# Altium PCB bdcmc25.PcbDoc (part 3 of 4)
Units mil, origin at the board's own origin, x right, y up, seen from the top; angles counter-clockwise.
Board outline 7750 x 2750 mil, 4 copper layers (Layer 1, Layer 2 (GND), Layer 3 (GND), Layer 4), stack 23.756 mil thick; 330 components, 156 nets, 997 pads, 1122 vias.
Unrouted connection lines stored in the file: 39.
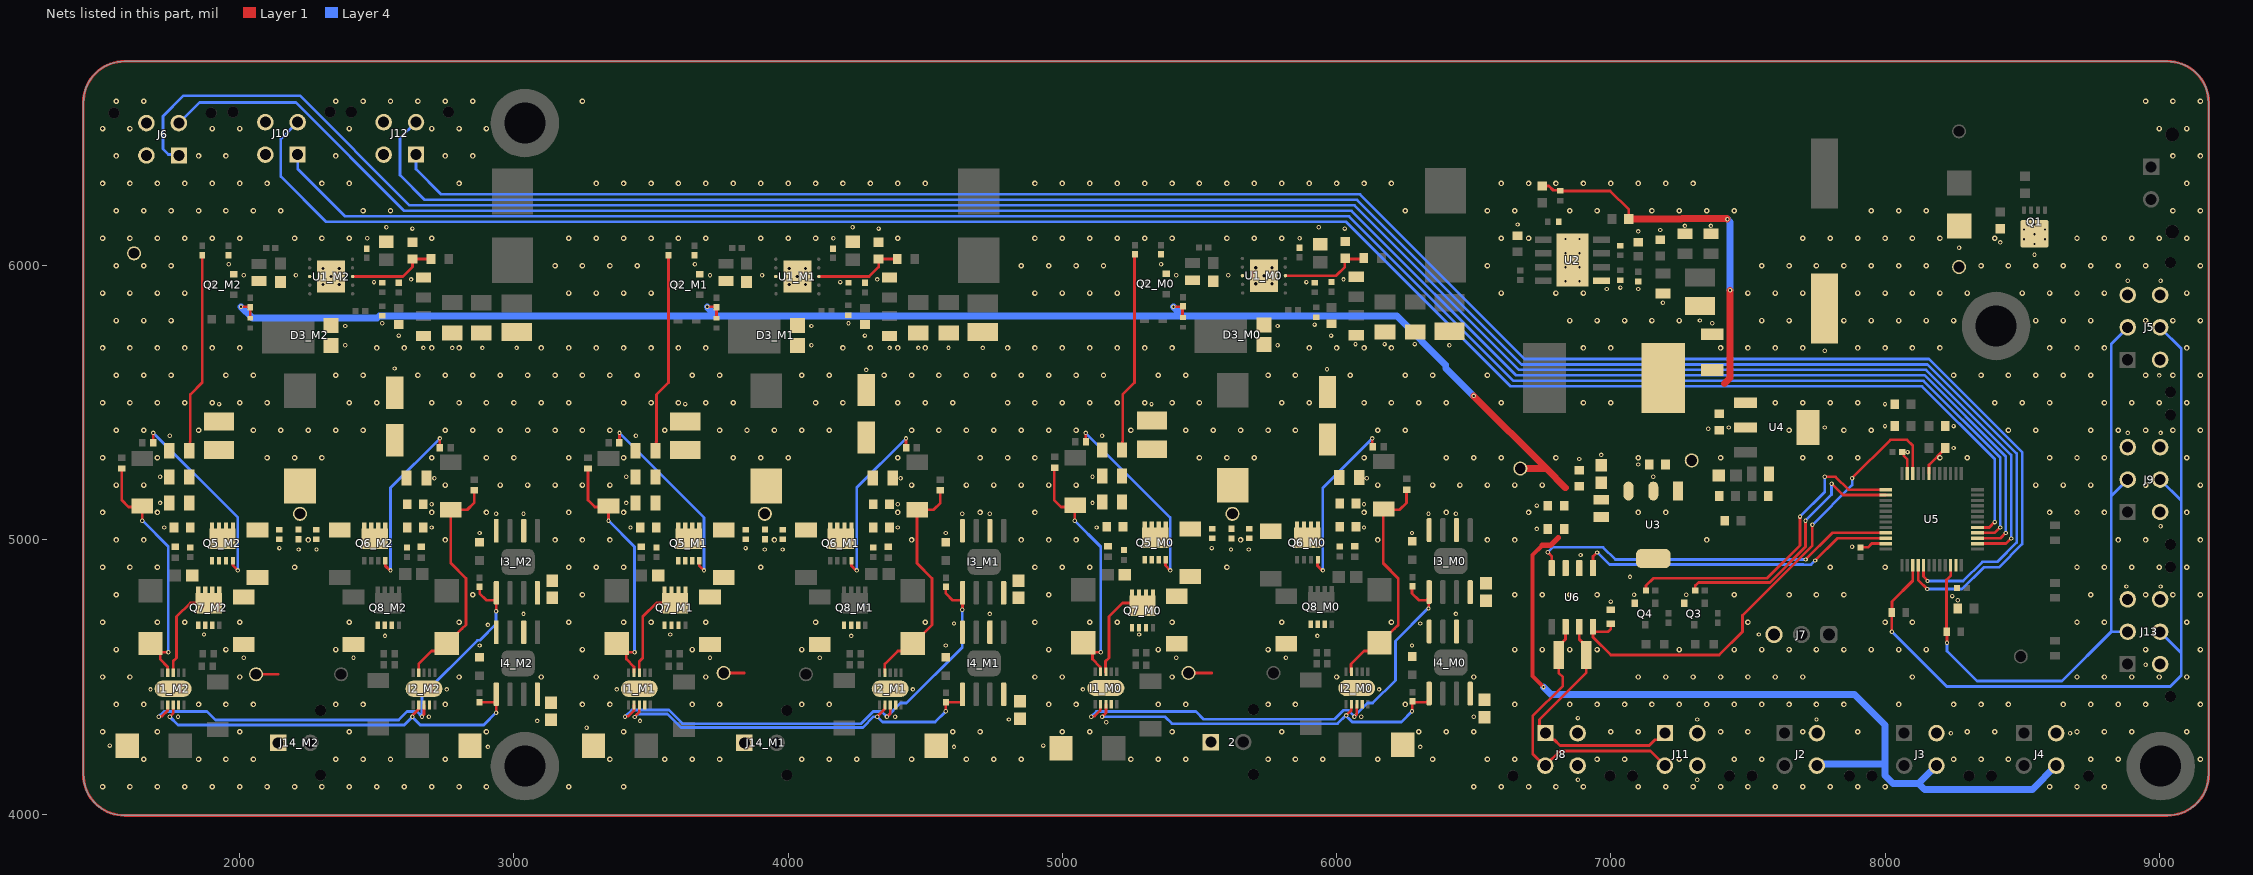
[diagram p4: the nets of this part, all layers, seen from the top]

## Via types
v1: diameter 20, hole 10, Layer 1 to Layer 4, 760 vias
v2: diameter 16, hole 8, Layer 1 to Layer 4, 340 vias
v3: diameter 23.62, hole 11.81, Layer 1 to Layer 4, 15 vias
v4: diameter 19.68, hole 7.87, Layer 1 to Layer 4, 7 vias

## Nets (pads, with @x,y where several pads share a name; then routed paths per layer and width w, separated by ;. In a path a pad name is that pad's centre, name@x,y a point inside that pad or via, vN(x,y) a via of type N, cw(c..) or ccw(c..) an arc to the next point about the centre after c; other vN are vias at no path point) (continued)
GND: (continued)
  other v1: 1500,4100 1600,4100 1700,4100 1800,4100 1900,4100 2000,4100 2100,4100 2200,4100 2300,4100 2400,4100 2500,4100 2600,4100 2700,4100 2800,4100 2900,4100 3200,4100 3400,4100 6500,4100 6600,4100 6700,4100 6800,4100 6900,4100 7100,4100 7200,4100 7300,4100 7400,4100 7500,4100 7600,4100 7700,4100 7800,4100 7900,4100 8000,4100 8600,4100 8700,4100 8800,4100 1650,4200 1850,4200 1950,4200 2050,4200 2350,4200 2450,4200 2550,4200 2750,4200 3350,4200 3550,4200 3650,4200 3750,4200 4050,4200 4150,4200 4250,4200 4450,4200 4650,4200 4750,4200 4850,4200 5250,4200 5350,4200 5450,4200 5750,4200 5850,4200 5950,4200 6150,4200 6350,4200 6550,4200 6650,4200 6950,4200 7050,4200 7250,4200 7450,4200 7550,4200 8250,4200 8350,4200 8450,4200 8750,4200 8850,4200 9150,4200 1500,4300 1700,4300 2000,4300 2400,4300 2900,4300 3400,4300 4600,4300 4700,4300 5000,4300 5100,4300 5400,4300 5800,4300 6300,4300 6400,4300 6500,4300 7000,4300 7100,4300 7400,4300 7500,4300 7700,4300 7900,4300 8300,4300 8400,4300 8700,4300 8800,4300 8900,4300 9100,4300 1550,4400 1650,4400 1850,4400 1950,4400 2050,4400 2350,4400 2450,4400 2750,4400 3250,4400 3350,4400 3650,4400 3750,4400 4050,4400 4150,4400 4950,4400 5050,4400 5350,4400 5450,4400 5750,4400 5850,4400 6250,4400 6650,4400 6850,4400 6950,4400 7050,4400 7150,4400 7250,4400 7350,4400 7450,4400 7550,4400 7650,4400 7750,4400 7850,4400 8050,4400 8250,4400 8350,4400 8450,4400 8650,4400 8750,4400 8850,4400 8950,4400 9150,4400 1500,4500 1600,4500 2000,4500 2800,4500 3100,4500 3300,4500 3700,4500 4900,4500 5000,4500 5400,4500 6000,4500 6500,4500 7100,4500 7200,4500 7300,4500 7400,4500 7500,4500 7600,4500 7700,4500 8100,4500 8700,4500 8800,4500 8900,4500 9000,4500 9100,4500 1550,4600 1950,4600 2350,4600 3250,4600 3650,4600 4050,4600 4950,4600 5350,4600 5750,4600 6650,4600 6750,4600 6850,4600 6950,4600 7250,4600 7450,4600 7550,4600 7650,4600 7750,4600 7850,4600 7950,4600 8050,4600 8150,4600 8950,4600 9150,4600 1500,4700 1700,4700 1800,4700 2000,4700 2400,4700 2800,4700 3200,4700 3400,4700 3500,4700 3700,4700 4100,4700 4500,4700 4900,4700 5100,4700 5200,4700 5400,4700 5800,4700 6200,4700 7500,4700 8000,4700 8100,4700 8700,4700 8800,4700 9100,4700 1550,4800 2850,4800 3250,4800 4950,4800 6650,4800 6750,4800 6850,4800 6950,4800 7450,4800 7650,4800 7750,4800 7850,4800 8750,4800 8950,4800 9050,4800 9150,4800 1500,4900 1600,4900 1700,4900 2200,4900 3200,4900 3300,4900 3400,4900 3900,4900 4900,4900 5000,4900 5100,4900 5600,4900 7800,4900 8000,4900 8700,4900 8800,4900 8900,4900 9000,4900 9100,4900 1550,5000 1650,5000 2250,5000 2750,5000 3150,5000 3250,5000 3350,5000 3950,5000 4450,5000 4850,5000 4950,5000 5050,5000 5650,5000 6150,5000 6550,5000 6650,5000 7350,5000 8850,5000 8950,5000 9150,5000 1500,5100 1700,5100 2700,5100 2900,5100 3200,5100 3400,5100 4400,5100 4700,5100 4900,5100 6100,5100 6400,5100 6700,5100 7100,5100 7200,5100 8600,5100 8700,5100 8800,5100 9100,5100 1550,5200 1650,5200 2750,5200 2950,5200 3050,5200 3150,5200 3250,5200 3350,5200 4450,5200 4650,5200 4750,5200 4850,5200 4950,5200 5050,5200 6150,5200 6350,5200 6450,5200 6550,5200 6650,5200 6750,5200 8550,5200 8650,5200 8750,5200 8950,5200 9150,5200 1500,5300 1700,5300 2100,5300 2200,5300 2300,5300 2700,5300 2900,5300 3000,5300 3200,5300 3400,5300 3800,5300 3900,5300 4000,5300 4400,5300 4700,5300 4800,5300 4900,5300 5500,5300 5600,5300 5700,5300 6100,5300 6400,5300 6500,5300 6600,5300 6800,5300 7100,5300 7400,5300 7700,5300 7800,5300 7900,5300 8200,5300 8300,5300 8600,5300 8700,5300 8800,5300 9100,5300 1550,5400 1650,5400 1850,5400 2050,5400 2150,5400 2250,5400 2350,5400 2450,5400 2750,5400 2850,5400 2950,5400 3050,5400 3150,5400 3250,5400 3350,5400 3550,5400 3750,5400 3850,5400 3950,5400 4050,5400 4150,5400 4450,5400 4550,5400 4650,5400 4750,5400 4850,5400 4950,5400 5050,5400 5250,5400 5450,5400 5550,5400 5650,5400 5750,5400 5850,5400 6150,5400 6250,5400 7650,5400 7850,5400 7950,5400 8450,5400 8550,5400 8750,5400 8850,5400 8950,5400 9050,5400 9150,5400 1500,5500 1600,5500 1700,5500 1800,5500 1900,5500 2000,5500 2100,5500 2400,5500 2500,5500 2700,5500 2800,5500 2900,5500 3000,5500 3100,5500 3200,5500 3400,5500 3500,5500 3600,5500 3700,5500 3800,5500 4100,5500 4200,5500 4400,5500 4500,5500 4600,5500 4800,5500 4900,5500 5000,5500 5100,5500 5200,5500 5300,5500 5400,5500 5500,5500 5800,5500 5900,5500 6100,5500 6200,5500 6300,5500 6400,5500 6600,5500 6900,5500 7000,5500 7600,5500 7700,5500 7800,5500 7900,5500 8400,5500 8500,5500 8600,5500 8800,5500 8900,5500 9000,5500 9100,5500 1550,5600 1650,5600 1750,5600 1950,5600 2050,5600 2350,5600 2450,5600 2650,5600 2750,5600 2850,5600 2950,5600 3050,5600 3150,5600 3250,5600 3350,5600 3450,5600 3650,5600 3750,5600 4050,5600 4150,5600 4350,5600 4450,5600 4550,5600 4650,5600 4750,5600 4850,5600 4950,5600 5050,5600 5150,5600 5350,5600 5450,5600 5750,5600 5850,5600 6050,5600 6250,5600 6350,5600 6550,5600 8250,5600 8350,5600 8450,5600 8550,5600 8650,5600 8750,5600 8950,5600 9050,5600 9150,5600 1500,5700 1600,5700 1700,5700 1800,5700 1900,5700 2000,5700 2500,5700 2600,5700 2700,5700 2800,5700 3100,5700 3200,5700 3300,5700 3400,5700 3500,5700 3600,5700 3700,5700 4200,5700 4300,5700 4400,5700 4500,5700 4800,5700 4900,5700 5000,5700 5100,5700 5200,5700 5300,5700 5400,5700 5900,5700 6000,5700 6100,5700 6200,5700 6900,5700 7000,5700 7400,5700 7500,5700 7600,5700 7700,5700 7900,5700 8000,5700 8100,5700 8200,5700 8600,5700 8700,5700 8800,5700 9100,5700 1550,5800 1650,5800 1750,5800 6850,5800 6950,5800 7050,5800 7150,5800 7250,5800 7550,5800 7650,5800 7850,5800 7950,5800 8050,5800 8150,5800 8250,5800 8550,5800 8650,5800 8750,5800 8950,5800 9050,5800 9150,5800 1500,5900 1600,5900 1700,5900 1800,5900 3200,5900 3300,5900 3400,5900 3500,5900 4900,5900 5000,5900 5100,5900 5200,5900 6600,5900 6800,5900 6900,5900 7500,5900 7600,5900 7700,5900 7900,5900 8000,5900 8100,5900 8200,5900 8300,5900 8500,5900 8600,5900 8700,5900 8800,5900 9100,5900 1550,6000 1650,6000 1750,6000 3150,6000 3250,6000 3350,6000 3450,6000 4850,6000 4950,6000 5050,6000 5150,6000 6550,6000 7550,6000 7650,6000 7750,6000 7850,6000 7950,6000 8050,6000 8150,6000 8350,6000 8450,6000 8550,6000 8650,6000 8750,6000 8850,6000 8950,6000 9150,6000 1500,6100 1600,6100 1700,6100 1800,6100 1900,6100 2000,6100 2200,6100 2300,6100 2400,6100 2700,6100 3200,6100 3300,6100 3400,6100 3500,6100 3600,6100 3700,6100 3900,6100 4000,6100 4100,6100 4400,6100 4900,6100 5000,6100 5100,6100 5200,6100 5300,6100 5400,6100 5600,6100 5700,6100 5800,6100 6600,6100 6700,6100 7700,6100 7800,6100 7900,6100 8000,6100 8100,6100 8200,6100 8400,6100 8700,6100 8800,6100 8900,6100 9000,6100 9100,6100 1550,6200 1650,6200 1750,6200 1850,6200 1950,6200 2050,6200 2150,6200 2450,6200 2550,6200 6250,6200 6550,6200 6650,6200 6850,6200 6950,6200 7150,6200 7250,6200 7350,6200 7450,6200 7950,6200 8050,6200 8150,6200 9050,6200 9150,6200 1500,6300 1600,6300 1700,6300 1800,6300 1900,6300 2000,6300 2100,6300 2300,6300 2400,6300 2800,6300 3300,6300 3400,6300 3500,6300 3600,6300 3700,6300 3800,6300 3900,6300 4000,6300 4100,6300 4200,6300 4300,6300 4400,6300 4500,6300 4900,6300 5000,6300 5100,6300 5200,6300 5300,6300 5400,6300 5500,6300 5600,6300 5700,6300 5800,6300 5900,6300 6000,6300 6100,6300 6200,6300 6600,6300 6700,6300 6800,6300 6900,6300 7000,6300 7100,6300 7200,6300 7300,6300 9100,6300 1550,6400 1850,6400 1950,6400 2350,6400 2750,6400 2850,6400 9050,6400 9150,6400 1500,6500 1600,6500 1900,6500 2000,6500 2400,6500 2700,6500 2800,6500 2900,6500 9000,6500 9100,6500 1550,6600 1650,6600 2350,6600 2450,6600 2550,6600 2650,6600 2750,6600 2850,6600 3250,6600 8950,6600 9050,6600 9150,6600
  other v2: 6880,4125 7315,4125 2905,4245 4605,4245 6305,4245 1526.16,4250 4930,4250 8240,4295 8675,4295 3265,4315 5160,4335 3085,4340 3460,4340 4805,4345 7315,4345 7750,4345 6880,4350 1775,4355 2690,4355 4390,4355 6090,4355 6500,4355 1675,4455 2755,4455 3375,4455 4455,4455 5075,4455 6155,4455 8950,4545 2015,4570 2415,4570 3715,4570 4115,4570 5415,4570 5815,4570 2875,4615 4575,4615 6275,4615 2530,4650 4230,4650 5930,4650 1870,4655 3570,4655 5280,4655 7540,4655 2905,4690 4605,4695 6305,4695 3035,4730 4735,4730 6435,4730 7000,4775 8265,4780 8245,4795 7085,4800 7275,4800 8880,4830 9005,4830 7070,4865 6890,4945 2215,4965 2280,4965 3915,4965 3980,4965 5615,4965 5680,4965 2145,4970 3845,4970 5545,4970 7880,4975 2875,5025 4575,5025 6275,5025 6730,5040 1725,5045 2700,5045 3425,5045 4400,5045 5125,5045 6100,5045 9005,5050 2935,5095 3035,5095 4635,5095 4735,5095 6335,5095 6435,5095 6730,5125 2700,5130 4400,5130 6100,5130 1710,5135 3410,5135 5110,5135 2710,5225 4410,5225 6110,5225 1710,5230 3410,5230 5110,5230 7155,5230 7100,5275 6885,5295 6965,5310 8082.26,5320 8250,5335 1745,5380 3445,5380 5145,5380 8885,5390 9005,5390 7355,5405 7430,5410 7780,5410 8000,5415 8250,5415 1925,5495 3625,5495 5325,5495 8000,5495 9000,5600 4285,5620 5965,5622.16 2565,5625 7780,5690 2670,5700 2775,5700 2885,5700 3010,5700 4370,5700 4475,5700 4585,5700 4710,5700 2385,5710 4085,5710 5785,5710 6411.51,5710 6068.94,5713.91 6175,5713.91 6285,5713.91 2580,5745 4280,5745 5980,5745 2385,5780 4085,5780 5785,5780 5920,5785 2520,5790 4220,5790 7370,5790 7325,5800 7190,5865 6985,5915 7100,5915 7035,5920 2490,5940 4190,5940 5890,5940 8885,5945 9005,5945 2625,5950 4325,5950 6025,5950 2015,5965 2205,5965 3715,5965 3905,5965 5415,5965 5605,5965 1960,6005 3660,6005 5360,6005 8545,6040 8270,6065 8420,6085 2465,6100 4165,6100 5865,6100 7100,6125 7180,6130 2630,6135 4330,6135 6030,6135 2535,6140 4235,6140 5935,6140 7270,6145 7365,6145 6660,6150
  other v3: 2303.97,5930.94 2363.02,5930.94 4004.08,5930.94 4063.14,5930.94 5705.47,5933.74 5764.53,5933.74 2333.49,5960.47 4033.61,5960.47 5735,5963.27 2303.97,5990 2363.02,5990 4004.08,5990 4063.14,5990 5705.47,5992.8 5764.53,5992.8
  other v4: 8545,6078.74 8506.61,6096.57 8583.39,6096.57 8545,6114.37 8506.61,6132.2 8583.39,6132.2 8545,6150
HO_1G_M0: D6_M0.2 D14_M0.2 I1_M0.4 R22_M0.2 | length 888.6
  Layer 1 w10: R22_M0.2@4970,5260.32 4970,5145 4995,5120 5041.61,5120 5045,5123.39 v2(5045,5070) ; I1_M0.4@5137.79,4516.1 5137.79,4537.21 5110,4565 5110,4587.2 5112.8,4590 v2(5140,4590)
  Layer 4 w10: v2(5045,5070) 5140,4975 v2(5140,4590)
HO_1G_M1: D6_M1.2 D14_M1.2 I1_M1.4 R22_M1.2 | length 888.6
  Layer 1 w10: R22_M1.2@3270,5260.32 3270,5145 3295,5120 3341.61,5120 3345,5123.39 v2(3345,5070) ; I1_M1.4@3437.79,4516.1 3437.79,4537.21 3410,4565 3410,4587.2 3412.8,4590 v2(3440,4590)
  Layer 4 w10: v2(3345,5070) 3440,4975 v2(3440,4590)
HO_1G_M2: D6_M2.2 D14_M2.2 I1_M2.4 R22_M2.2 | length 888.6
  Layer 1 w10: R22_M2.2@1570,5260.32 1570,5145 1595,5120 1641.61,5120 D6_M2.2@1645,5123.39 v2(1645,5070) ; I1_M2.4@1737.79,4516.1 1737.79,4537.21 1710,4565 1710,4587.2 1712.8,4590 v2(1740,4590)
  Layer 4 w10: v2(1645,5070) 1740,4975 v2(1740,4590)
HO_1M_M0: Q5_M0.1 R23_M0.2 | length 706.7
  Layer 1 w10: R23_M0.2@5084.69,5355 5085,5355.31 v2(5085,5390) ; Q5_M0.1@5375.71,4924.53 5375.71,4906.49 v2(5393.26,4888.95)
  Layer 4 w10: v2(5085,5390) 5393.26,5081.74 v2(5393.26,4888.95)
HO_1M_M1: Q5_M1.1 R23_M1.2 | length 706.7
  Layer 1 w10: R23_M1.2@3384.69,5355 3385,5355.31 v2(3385,5390) ; Q5_M1.1@3675.71,4924.53 3675.71,4906.49 v2(3693.26,4888.95)
  Layer 4 w10: v2(3385,5390) 3693.26,5081.74 v2(3693.26,4888.95)
HO_1M_M2: Q5_M2.1 R23_M2.2 | length 706.7
  Layer 1 w10: R23_M2.2@1684.69,5355 1685,5355.31 v2(1685,5390) ; Q5_M2.1@1975.71,4924.53 1975.71,4906.49 v2(1993.26,4888.95)
  Layer 4 w10: v2(1685,5390) 1993.26,5081.74 v2(1993.26,4888.95)
HO_2G_M0: D7_M0.2 D17_M0.2 I2_M0.4 R25_M0.2 | length 846.3
  Layer 1 w10: I2_M0.4@6052.79,4516.1 6052.79,4547.79 6100,4595 6127.8,4595 6155,4622.2 6156.97,4622.2 6211.13,4676.36 6211.36,4676.36 6225,4690 6225,4859.72 6170,4914.72 6170,5110 6230,5110 6255,5135 R25_M0.2@6255,5180.32
HO_2G_M1: D7_M1.2 D17_M1.2 I2_M1.4 R25_M1.2 | length 846.3
  Layer 1 w10: I2_M1.4@4352.79,4516.1 4352.79,4547.79 4400,4595 4427.8,4595 4455,4622.2 4456.97,4622.2 4511.13,4676.36 4511.36,4676.36 4525,4690 4525,4859.72 4470,4914.72 4470,5110 4530,5110 4555,5135 R25_M1.2@4555,5180.32
HO_2G_M2: D7_M2.2 D17_M2.2 I2_M2.4 R25_M2.2 | length 846.3
  Layer 1 w10: I2_M2.4@2652.79,4516.1 2652.79,4547.79 2700,4595 2727.8,4595 D17_M2.2@2755,4622.2 2756.97,4622.2 2811.13,4676.36 2811.36,4676.36 2825,4690 2825,4859.72 2770,4914.72 D7_M2.2@2770,5110 2830,5110 2855,5135 R25_M2.2@2855,5180.32
HO_2M_M0: Q6_M0.1 R24_M0.2 | length 634.2
  Layer 1 w10: Q6_M0.1@5930.71,4924.53 5930.71,4905.71 5947.48,4888.95 v2(5950,4888.95) ; v2(6130,5370) 6130,5336.93 R24_M0.2@6130.32,5336.61
  Layer 4 w10: v2(5950,4888.95) 5950,5190 v2(6130,5370)
HO_2M_M1: Q6_M1.1 R24_M1.2 | length 634.2
  Layer 1 w10: Q6_M1.1@4230.71,4924.53 4230.71,4905.71 4247.48,4888.95 v2(4250,4888.95) ; v2(4430,5370) 4430,5336.93 R24_M1.2@4430.32,5336.61
  Layer 4 w10: v2(4250,4888.95) 4250,5190 v2(4430,5370)
HO_2M_M2: Q6_M2.1 R24_M2.2 | length 634.2
  Layer 1 w10: Q6_M2.1@2530.71,4924.53 2530.71,4905.71 2547.48,4888.95 v2(2550,4888.95) ; v2(2730,5370) 2730,5336.93 R24_M2.2@2730.32,5336.61
  Layer 4 w10: v2(2550,4888.95) 2550,5190 v2(2730,5370)
I2C1_SCL: J5.P$5 J9.P$5 J13.P$5 R15.2 U5.39 | length 2940.6
  Layer 1 w4: R15.2@8024.41,4735 R15.2@8025,4734.41
  Layer 1 w10: R15.2@8024.7,4733.82 8024.7,4665.3 v2(8025,4665) ; R15.2@8024.7,4743.82 8025,4744.11 8025,4775 8101.1,4851.1 U5.39@8101.1,4907.68 U5.39@8100,4906.58
  Layer 4 w10: v2(8025,4665) 8225,4465 9040,4465 9080,4505 9080,4588.11 ; J13.P$5@9003.11,4665 9080,4588.11 ; J9.P$5@9003.11,5220 9080,5143.11 ; J5.P$5@9003.11,5775 9080,5698.11 9080,5143.11 ; 9080,4588.11 9080,5143.11
I2C1_SDA: J5.P$2 J9.P$2 J13.P$2 R14.2 U5.46 | length 2319.7
  Layer 1 w4: R14.2@8224.41,4665 R14.2@8225.8,4663.61
  Layer 1 w10: R14.2@8224.41,4665 8224.41,4854.41 8240,4870 8240,4906.58 U5.46@8238.9,4907.68 ; v2(8225.8,4625.17) R14.2@8225.8,4663.61
  Layer 4 w10: v2(8225.8,4625.17) 8225.8,4594.2 8335,4485 8645,4485 8825,4665 ; J13.P$2@8885,4665 8825,4665 ; J9.P$2@8885,5220 8825,5160 ; J5.P$2@8885,5775 8825,5715 8825,5160 ; 8825,4665 8825,5160
LIMIT_0_A: J6.P$1 U5.2 | length 7936.8
  Layer 1 w10: U5.2@8337.32,4986.42 8441.42,4986.42 v2(8460,5005)
  Layer 4 w10: J6.P$1@1778.12,6401.89 1774.82,6405.19 1739.81,6405.19 1720,6425 1720,6545 1795,6620 2220,6620 2620,6220 6065,6220 6665,5620 8150,5620 8460,5310 v2(8460,5005)
LIMIT_0_B: J6.P$3 U5.3 | length 7617.8
  Layer 1 w10: U5.3@8337.32,5006.1 8421.1,5006.1 v2(8440,5025)
  Layer 4 w10: J6.P$3@1778.12,6520 1853.16,6595.04 2204.96,6595.04 2600,6200 6055,6200 6655,5600 8145,5600 8440,5305 v2(8440,5025)
LIMIT_1_A: J10.P$1 U5.4 | length 7042
  Layer 1 w10: U5.4@8337.32,5025.79 8399.61,5025.79 8418.83,5045 v2(8420,5045)
  Layer 4 w10: J10.P$1@2211.56,6405 2211.56,6353.44 2385,6180 6045,6180 6645,5580 8140,5580 8420,5300 v2(8420,5045)
LIMIT_1_B: J10.P$3 U5.5 | length 7201
  Layer 1 w10: U5.5@8337.32,5045.47 8379.93,5045.47 8399.46,5065 v2(8400,5065)
  Layer 4 w10: J10.P$3@2211.56,6523.11 2150,6461.55 2150,6325 2315,6160 6035,6160 6635,5560 8135,5560 8400,5295 v2(8400,5065)
LIMIT_2_A: J12.P$1 U5.40 | length 7186.8
  Layer 1 w10: U5.40@8120.79,4907.68 8120.79,4854.21 v2(8154,4821)
  Layer 4 w10: J12.P$1@2643.12,6405 2643.12,6351.88 2735,6260 6085,6260 6685,5660 8160,5660 8500,5320 8500,4985 8415,4900 8360,4900 8281,4821 v2(8154,4821)
LIMIT_2_B: J12.P$3 U5.41 | length 7303.8
  Layer 1 w10: U5.41@8140.47,4907.68 8140.47,4866.15 8155,4851.62 v2(8155,4850)
  Layer 4 w10: J12.P$3@2643.12,6523.11 2585,6464.99 2585,6330 2675,6240 6075,6240 6675,5640 8155,5640 8480,5315 8480,4990.86 8409.14,4920 8355,4920 8285,4850 v2(8155,4850)
M+_M0: 2.1 C61_M0.1 C61_M1.1 C61_M2.1 D8_M0.1 D8_M1.1 D8_M2.1 D15_M0.2 D15_M1.2 D15_M2.2 I1_M0.3 I1_M1.3 I1_M2.3 J14_M1.1 J14_M2.1 Q5_M0.2 Q5_M1.2 Q5_M2.2 Q7_M0.3 Q7_M1.3 Q7_M2.3 TP8_M0.1 TP8_M1.1 TP8_M2.1 | length 1281.6
  Layer 1 w10: I1_M2.3@1757.47,4516.1 1757.47,4557.47 1770,4570 1770,4720 1820,4770 1887.16,4770 Q7_M2.3@1887.32,4769.84 ; TP8_M0.1@2060,4510 2140,4510 ; I1_M1.3@3457.47,4516.1 3457.47,4557.47 3470,4570 3470,4720 3520,4770 3587.16,4770 Q7_M1.3@3587.32,4769.84 ; TP8_M1.1@3765,4515 3840,4515 ; I1_M0.3@5157.47,4516.1 5157.47,4557.47 5170,4570 5170,4720 5220,4770 5287.16,4770 Q7_M0.3@5287.32,4769.84 ; TP8_M2.1@5460,4515 5545,4515